# EAGLE board brama - print (EAGLE 6.3)
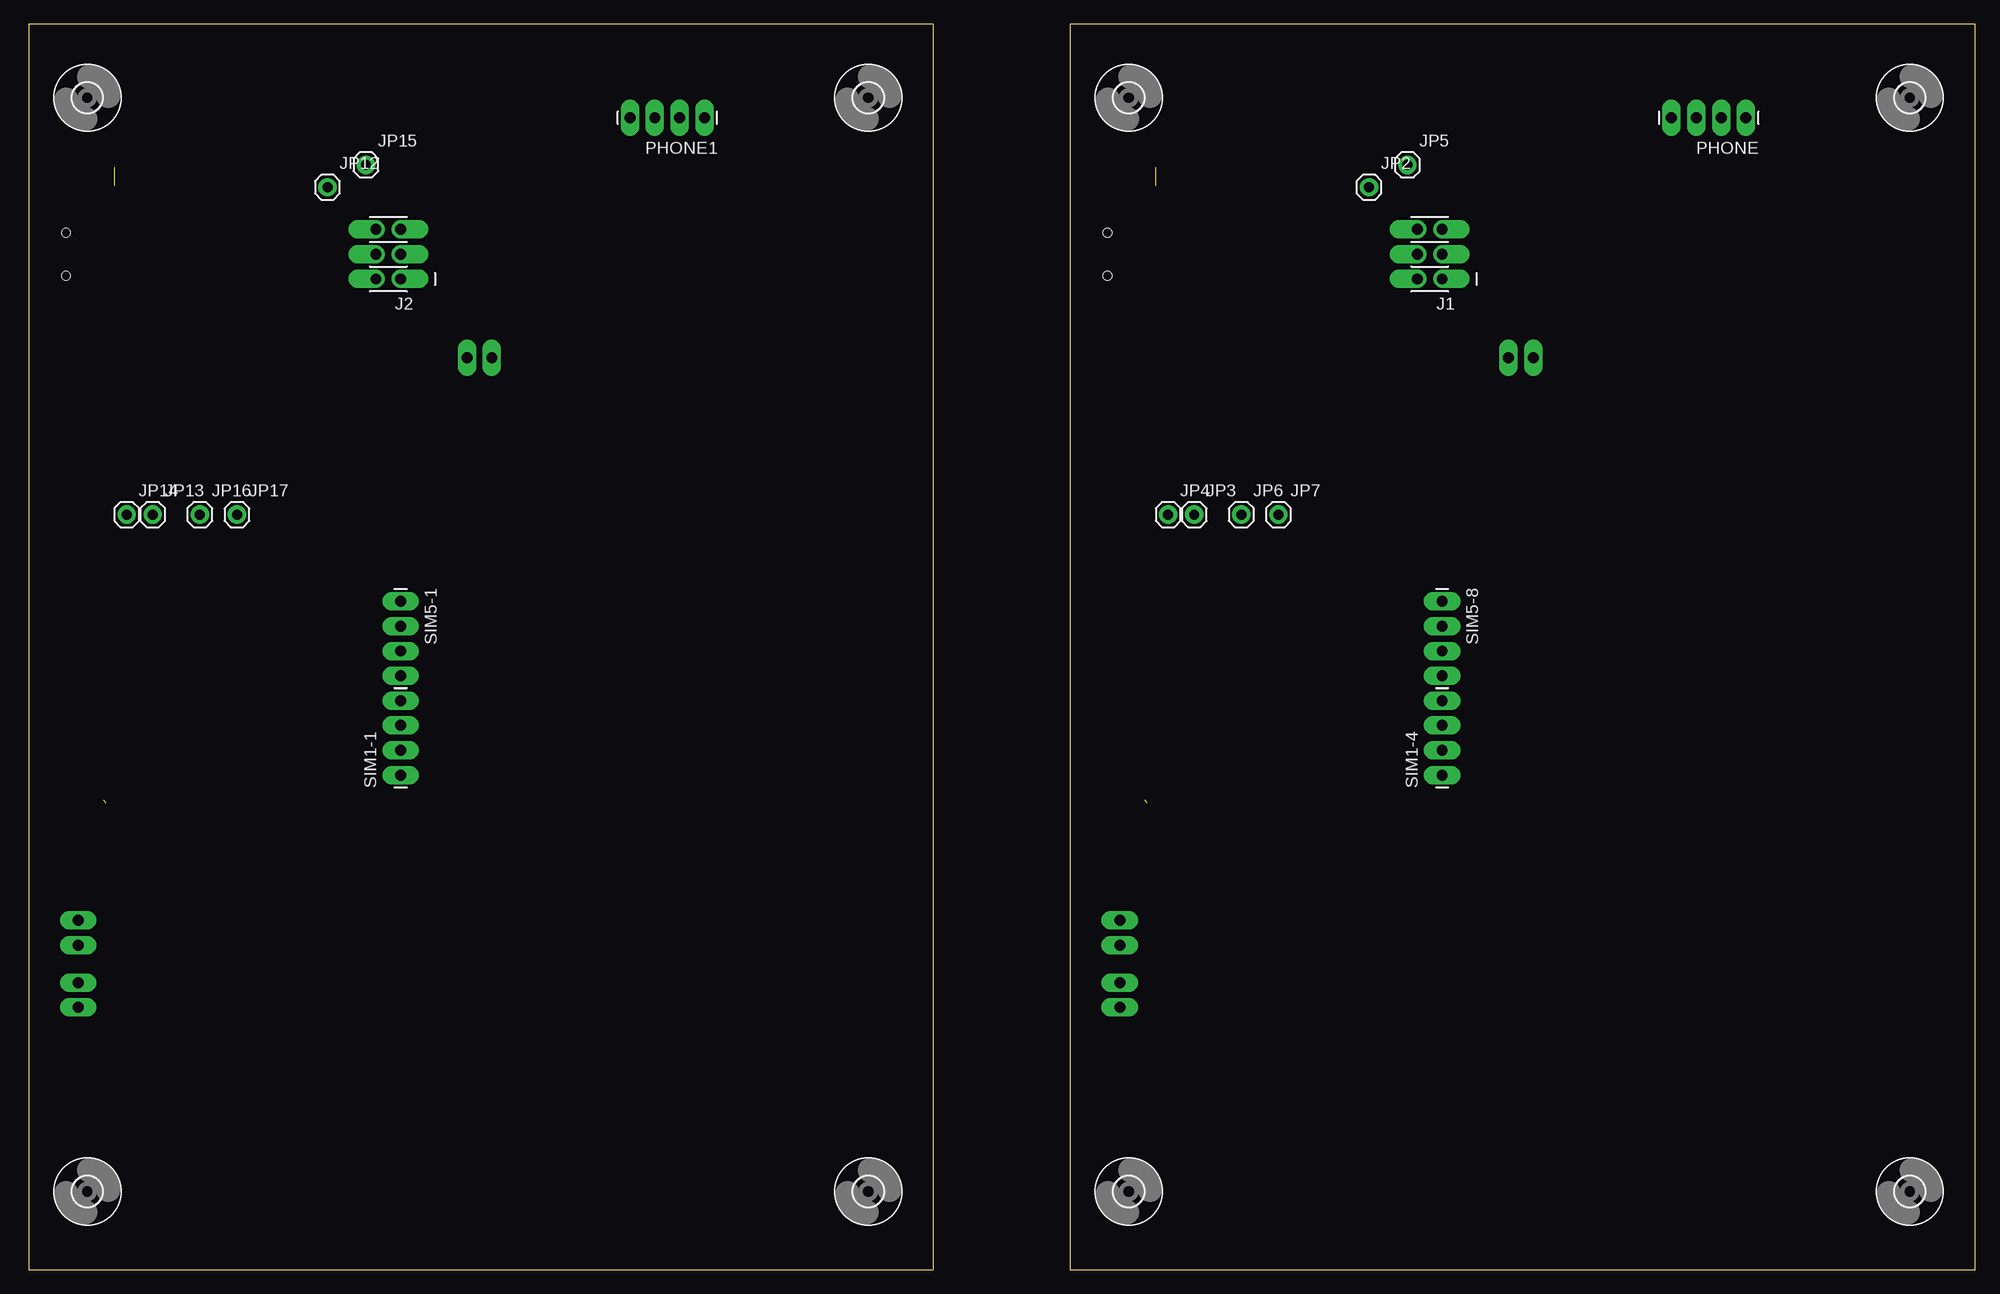
[diagram p0: board, top side]
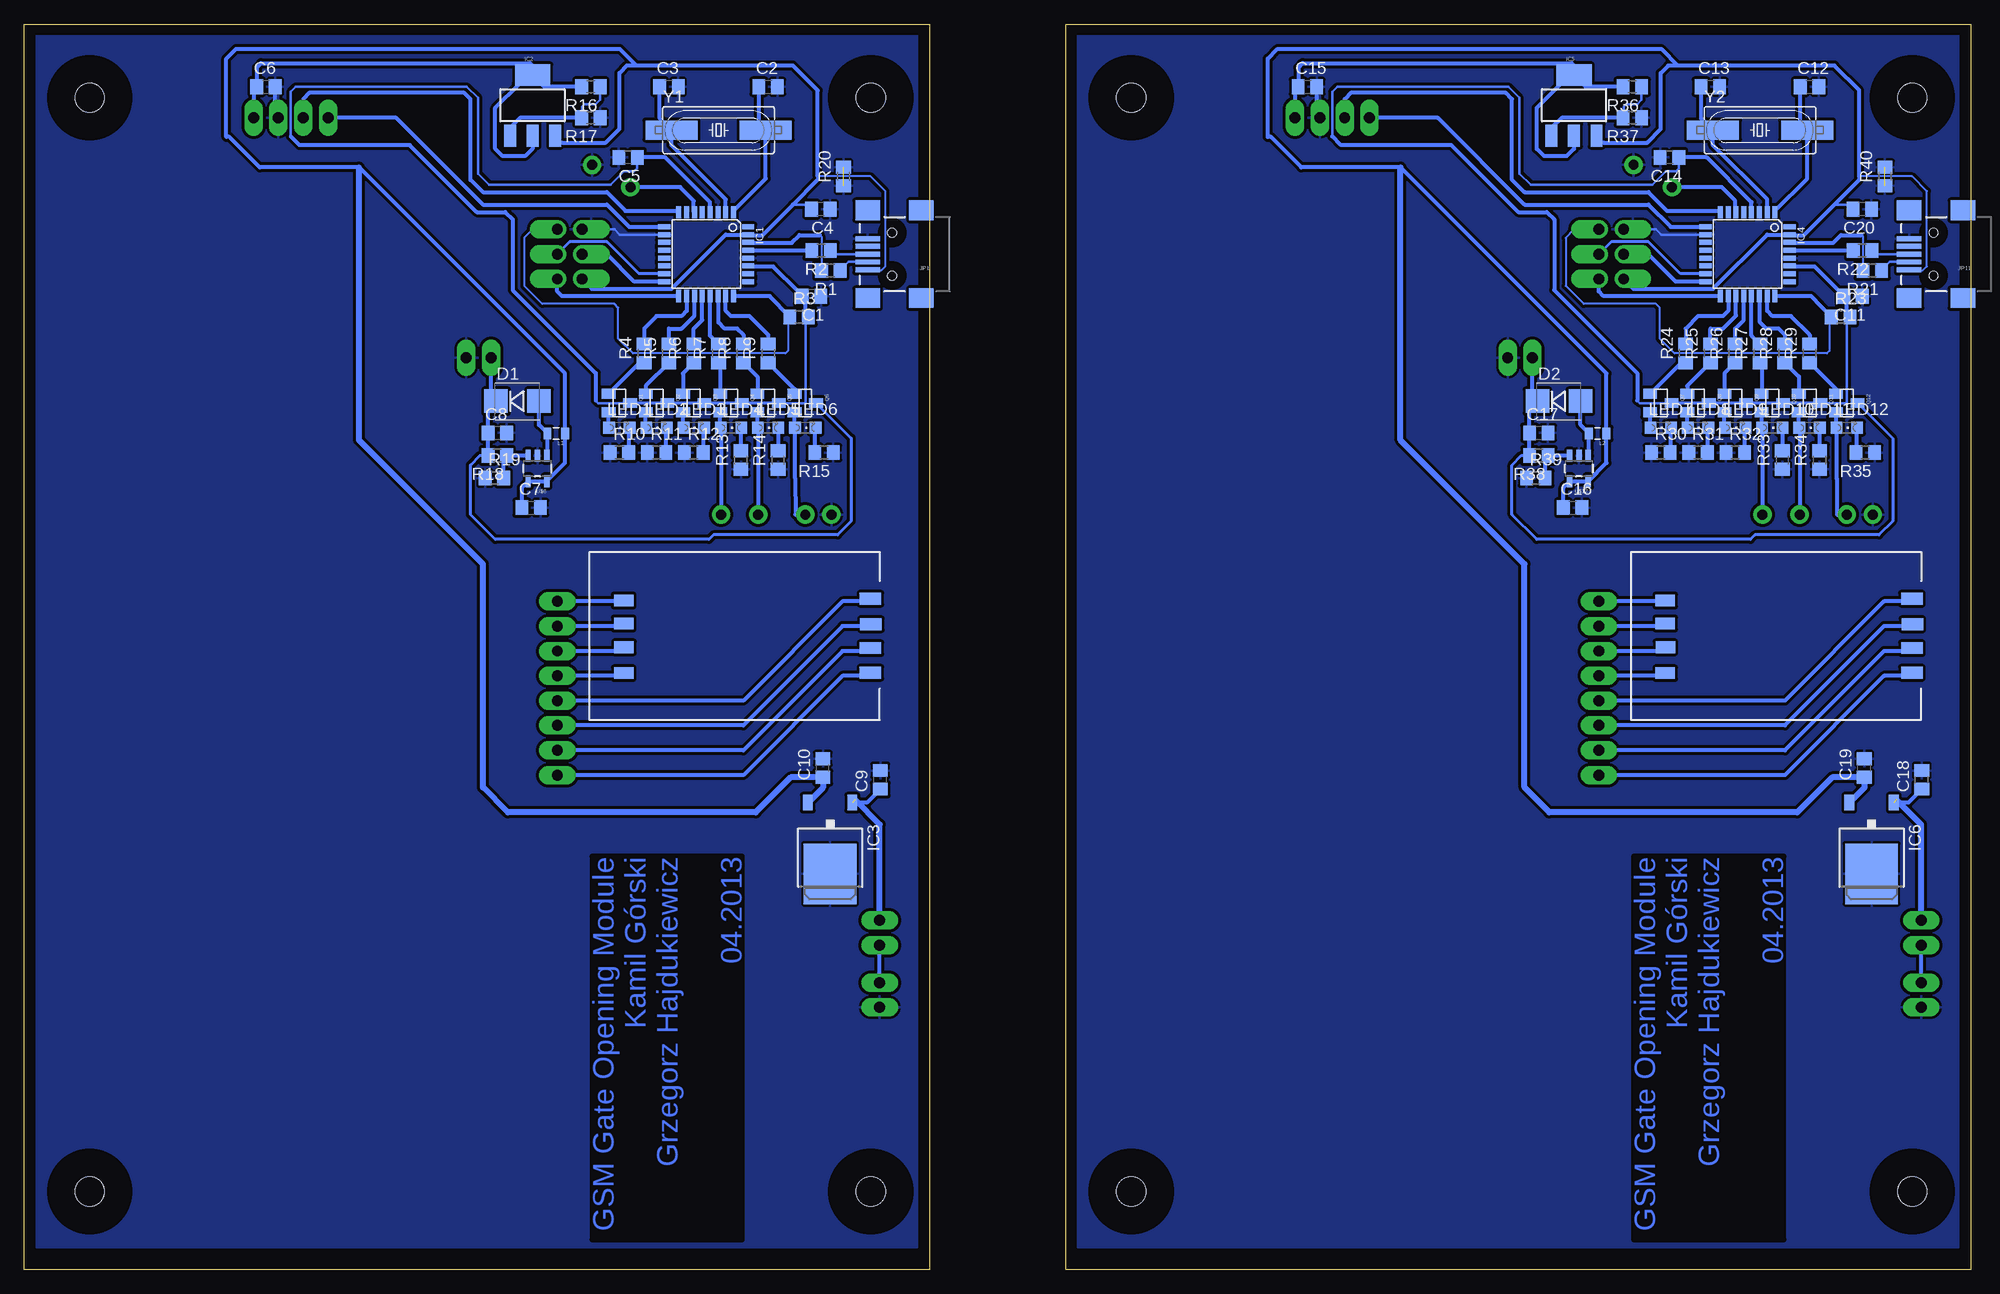
[diagram p1: board, bottom side, seen from below]

Size 199.37 x 127.51 mm. Coordinates in mm from the lower left corner, seen from the top.
Outline: 106.68,0 199.37,0 199.37,127.51 106.68,127.51 106.68,0
Outline: 0,0 92.69,0 92.69,127.51 0,127.51 0,0
Copper layers (1*16): Top 0.035mm / dielectric 1.5mm / Bottom 0.035mm
Design rules "default": minimum track width 10mil, minimum drill 24mil, track to track 8mil, track to pad 8mil, pad to pad 8mil, via to via 8mil, smd to smd 8mil, copper to edge 40mil, drill to drill 8mil, minimum pad ring 10mil, minimum via ring 8mil, stop-mask expansion 4mil, vias tented up to drill 0mil, thermal gap 10mil

## Footprints (pad centres in the part's own frame; a part is rotated, then mirrored left to right if it is on the bottom)
C0805 = smd 1.3 x 1.5: 1 -0.95,0; 2 0.95,0
SMB-DIODE = smd 2.4 x 2.4: A 2.2,0; C -2.2,0
TQFP32-08 = smd 1.27 x 0.508: 1 -4.293,2.8; 2 -4.293,2; 3 -4.293,1.2; 4 -4.293,0.4; 5 -4.293,-0.4; 6 -4.293,-1.2; 7 -4.293,-2; 8 -4.293,-2.8; 17 4.293,-2.8; 18 4.293,-2; 19 4.293,-1.2; 20 4.293,-0.4; 21 4.293,0.4; 22 4.293,1.2; 23 4.293,2; 24 4.293,2.8 | smd 0.508 x 1.27: 9 -2.8,-4.293; 10 -2,-4.293; 11 -1.2,-4.293; 12 -0.4,-4.293; 13 0.4,-4.293; 14 1.2,-4.293; 15 2,-4.293; 16 2.8,-4.293; 25 2.8,4.293; 26 2,4.293; 27 1.2,4.293; 28 0.4,4.293; 29 -0.4,4.293; 30 -1.2,4.293; 31 -2,4.293; 32 -2.8,4.293
SOT223 = smd 1.219 x 2.235: 1 -2.311,-3.099; 2 0,-3.099; 3 2.311,-3.099 | smd 3.6 x 2.2: 4 0,3.099
TO252 = smd 1 x 1.6: 1 -2.28,-4.8; 2 2.28,-4.8 | smd 5.4 x 6.2: 3 0,2.5
2X3_OFFSET = drill 1.118 pad 1.88 offset: 1 -2.54,-1.27; 2 -2.54,1.27; 3 0,-1.27; 4 0,1.27; 5 2.54,-1.27; 6 2.54,1.27
USB-MINIB = smd 2.5 x 0.5: D+ 2.5,0; D- 2.5,0.8; GND 2.5,-1.6; ID 2.5,-0.8; VBUS 2.5,1.6 | smd 2.5 x 2: MTN1 -3,4.5; MTN2 2.5,4.5; MTN3 -3,-4.5; MTN4 2.5,-4.5 | hole 0.9: 0,2.2; 0,-2.2
1X01 = drill 1.016 pad 1.88: 1 0,0
1X02_LONGPADS = drill 1.118 pad 1.88 long: 1 0,0; 2 2.54,0
0805 = smd 0.8 x 1.2: 1 -0.9,0; 2 0.9,0
CHIPLED_0805 = smd 1.2 x 1.2: A 0,-1.05; C 0,1.05
1X04_LONGPADS = drill 1.118 pad 1.88 long: 1 0,0; 2 2.54,0; 3 5.08,0; 4 7.62,0
SOT23 = smd 1 x 1.4: 1 -0.95,-1.1; 2 0.95,-1.1; 3 0,1.1
R0805 = smd 1.3 x 1.5: 1 -0.95,0; 2 0.95,0
SIMHOLDER2 = smd 2.2 x 1.2: 1 0.95,4.81; 2 0.91,7.41; 3 0.95,9.86; 4 0.95,12.39 | smd 2 x 1.2: 5 26.22,12.42; 6 26.2,9.78; 7 26.22,7.34; 8 26.22,4.98
3,0 = hole 3: 0,0
SOT23-5 = smd 0.55 x 1.2: !SHDN 0.95,1.3; FB 0.95,-1.3; GND 0,-1.3; SW -0.95,-1.3; VIN -0.95,1.3
HC49UP = smd 5.334 x 1.93: 1 -4.826,0; 2 4.826,0

## Placement (x,y rotation side)
C1  1uF  [C0805]  118.75,99.67 180 bottom
C2  22p  [C0805]  123.19,121.12 0 bottom
C3  22p  [C0805]  133.35,121.12 0 bottom
C4  22p  [C0805]  117.8,108.58 180 bottom
C5  100n  [C0805]  137.54,113.89 180 bottom
C6  100n  [C0805]  174.62,121.12 0 bottom
C7  4,7uF  [C0805]  147.46,78.03 0 bottom
C8  4,7uF  [C0805]  150.93,85.68 0 bottom
C9  330n  [C0805]  111.7,50.15 90 bottom
C10  100n  [C0805]  117.59,51.36 90 bottom
C11  1uF  [C0805]  12.07,99.67 180 bottom
C12  22p  [C0805]  16.51,121.12 0 bottom
C13  22p  [C0805]  26.67,121.12 0 bottom
C14  100n  [C0805]  30.86,113.89 180 bottom
C15  100n  [C0805]  67.95,121.12 0 bottom
C16  4,7uF  [C0805]  40.78,78.03 0 bottom
C17  4,7uF  [C0805]  44.25,85.68 0 bottom
C18  330n  [C0805]  5.02,50.15 90 bottom
C19  100n  [C0805]  10.91,51.36 90 bottom
C20  22p  [C0805]  11.12,108.58 180 bottom
D1  [SMB-DIODE]  148.87,88.93 0 bottom
D2  [SMB-DIODE]  42.19,88.93 0 bottom
E$1  [A4P-LOC]  238.76,-31.91 90 top  (outside the outline)
IC1  AT90USB162A  [TQFP32-08]  129.54,103.98 270 bottom
IC2  [SOT223]  147.32,119.22 0 bottom
IC3  7806DT  [TO252]  116.84,43.02 180 bottom
IC4  AT90USB162A  [TQFP32-08]  22.86,103.98 270 bottom
IC5  [SOT223]  40.64,119.22 0 bottom
IC6  7806DT  [TO252]  10.16,43.02 180 bottom
J1  AVR_SPI_PRG_6OFFSET_PADS  [2X3_OFFSET]  143.51,103.98 90 top
J2  AVR_SPI_PRG_6OFFSET_PADS  [2X3_OFFSET]  36.83,103.98 90 top
JP1  USBSMD  [USB-MINIB]  110.49,103.98 180 bottom
JP2  M01PTH  [1X01]  137.29,110.84 0 top
JP3  M01PTH  [1X01]  119.38,77.31 0 top
JP4  M01PTH  [1X01]  116.71,77.31 0 top
JP5  M01PTH  [1X01]  141.22,113.12 0 top
JP6  M01PTH  [1X01]  124.21,77.31 0 top
JP7  M01PTH  [1X01]  128.02,77.31 0 top
JP8  [1X02_LONGPADS]  151.58,93.37 0 top
JP9  [1X02_LONGPADS]  111.76,26.85 90 top
JP10  [1X02_LONGPADS]  111.76,35.77 270 top
JP11  USBSMD  [USB-MINIB]  3.81,103.98 180 bottom
JP12  M01PTH  [1X01]  30.61,110.84 0 top
JP13  M01PTH  [1X01]  12.7,77.31 0 top
JP14  M01PTH  [1X01]  10.03,77.31 0 top
JP15  M01PTH  [1X01]  34.54,113.12 0 top
JP16  M01PTH  [1X01]  17.53,77.31 0 top
JP17  M01PTH  [1X01]  21.34,77.31 0 top
JP18  [1X02_LONGPADS]  44.9,93.37 0 top
JP19  [1X02_LONGPADS]  5.08,26.85 90 top
JP20  [1X02_LONGPADS]  5.08,35.77 270 top
L1  [0805]  144.9,85.62 180 bottom
L2  [0805]  38.22,85.62 180 bottom
LED1  [CHIPLED_0805]  138.43,86.2 270 bottom
LED2  [CHIPLED_0805]  134.62,86.2 270 bottom
LED3  [CHIPLED_0805]  130.81,86.2 270 bottom
LED4  [CHIPLED_0805]  127,86.2 270 bottom
LED5  [CHIPLED_0805]  123.19,86.2 270 bottom
LED6  [CHIPLED_0805]  119.38,86.2 270 bottom
LED7  [CHIPLED_0805]  31.75,86.2 270 bottom
LED8  [CHIPLED_0805]  27.94,86.2 270 bottom
LED9  [CHIPLED_0805]  24.13,86.2 270 bottom
LED10  [CHIPLED_0805]  20.32,86.2 270 bottom
LED11  [CHIPLED_0805]  16.51,86.2 270 bottom
LED12  [CHIPLED_0805]  12.7,86.2 270 bottom
PHONE  [1X04_LONGPADS]  175.9,117.95 180 top
PHONE1  [1X04_LONGPADS]  69.22,117.95 180 top
Q1  [SOT23]  138.43,88.74 270 bottom
Q2  [SOT23]  134.62,88.74 270 bottom
Q3  [SOT23]  130.81,88.74 270 bottom
Q4  [SOT23]  127,88.74 270 bottom
Q5  [SOT23]  123.19,88.74 270 bottom
Q6  [SOT23]  119.38,88.74 270 bottom
Q7  [SOT23]  31.75,88.74 270 bottom
Q8  [SOT23]  27.94,88.74 270 bottom
Q9  [SOT23]  24.13,88.74 270 bottom
Q10  [SOT23]  20.32,88.74 270 bottom
Q11  [SOT23]  16.51,88.74 270 bottom
Q12  [SOT23]  12.7,88.74 270 bottom
R1  22R  [R0805]  116.78,102.31 180 bottom
R2  22R  [R0805]  117.77,104.35 180 bottom
R3  4k7  [R0805]  120.02,97.53 0 bottom
R4  [R0805]  135.89,93.82 90 bottom
R5  [R0805]  133.35,93.82 90 bottom
R6  [R0805]  130.81,93.82 90 bottom
R7  [R0805]  128.27,93.82 90 bottom
R8  [R0805]  125.73,93.82 90 bottom
R9  [R0805]  123.19,93.82 90 bottom
R10  100  [R0805]  138.43,83.66 0 bottom
R11  100  [R0805]  134.62,83.66 0 bottom
R12  100  [R0805]  130.81,83.66 0 bottom
R13  100  [R0805]  125.98,82.9 90 bottom
R14  100  [R0805]  122.17,82.9 90 bottom
R15  470  [R0805]  117.48,83.66 180 bottom
R16  [R0805]  141.35,121.12 180 bottom
R17  [R0805]  141.35,117.95 180 bottom
R18  240k  [R0805]  150.93,83.37 180 bottom
R19  27k  [R0805]  151.23,81.05 0 bottom
R20  0  [R0805]  115.47,111.94 90 bottom
R21  22R  [R0805]  10.1,102.31 180 bottom
R22  22R  [R0805]  11.09,104.35 180 bottom
R23  4k7  [R0805]  13.34,97.53 0 bottom
R24  [R0805]  29.21,93.82 90 bottom
R25  [R0805]  26.67,93.82 90 bottom
R26  [R0805]  24.13,93.82 90 bottom
R27  [R0805]  21.59,93.82 90 bottom
R28  [R0805]  19.05,93.82 90 bottom
R29  [R0805]  16.51,93.82 90 bottom
R30  100  [R0805]  31.75,83.66 0 bottom
R31  100  [R0805]  27.94,83.66 0 bottom
R32  100  [R0805]  24.13,83.66 0 bottom
R33  100  [R0805]  19.3,82.9 90 bottom
R34  100  [R0805]  15.49,82.9 90 bottom
R35  470  [R0805]  10.8,83.66 180 bottom
R36  [R0805]  34.67,121.12 180 bottom
R37  [R0805]  34.67,117.95 180 bottom
R38  240k  [R0805]  44.25,83.37 180 bottom
R39  27k  [R0805]  44.55,81.05 0 bottom
R40  0  [R0805]  8.79,111.94 90 bottom
SIM1-1  [1X04_LONGPADS]  38.1,50.64 90 top
SIM1-4  [1X04_LONGPADS]  144.78,50.64 90 top
SIM5-1  [1X04_LONGPADS]  38.1,68.42 270 top
SIM5-8  [1X04_LONGPADS]  144.78,68.42 270 top
U$1  SIMHOLDER2  [SIMHOLDER2]  111.76,73.5 180 bottom
U$2  [3,0]  192.68,8 0 top
U$3  [3,0]  112.68,120 0 top
U$4  [3,0]  192.68,120 0 top
U$5  [3,0]  112.68,8 0 top
U$6  LM2704MF-ADJ  [SOT23-5]  146.82,82.03 180 bottom
U$7  SIMHOLDER2  [SIMHOLDER2]  5.08,73.5 180 bottom
U$8  [3,0]  86,8 0 top
U$9  [3,0]  6,120 0 top
U$10  [3,0]  86,120 0 top
U$11  [3,0]  6,8 0 top
U$12  LM2704MF-ADJ  [SOT23-5]  40.14,82.03 180 bottom
Y1  [HC49UP]  128.27,116.68 0 bottom
Y2  [HC49UP]  21.59,116.68 0 bottom

## Library data of the parts
C1-C20 R1-R40 = rcl
D1 D2 Q1-Q12 = SparkFun-DiscreteSemi
E$1 = frames
IC1 IC4 = adafruit
IC2 IC5 = SparkFun-PowerIC
IC3 IC6 = linear
J1 J2 JP1-JP20 PHONE PHONE1 SIM1-1 SIM1-4 SIM5-1 SIM5-8 U$1 U$7 = SparkFun-Connectors
L1 L2 = SparkFun-Passives
LED1-LED12 = led
U$2-U$5 U$8-U$11 = holes
U$6 U$12 = Step-Up
Y1 Y2 = SparkFun-FreqCtrl

## Nets
3V1: C11.2 C14.1 IC4.4 IC4.27 Q7.3 Q8.3 Q9.3 Q10.3 Q11.3 R23.2
3V3: C1.2 C5.1 IC1.4 IC1.27 Q1.3 Q2.3 Q3.3 Q4.3 Q5.3 R3.2
5V: C4.2 C7.1 C10.1 IC1.31 IC2.3 IC3.2 J1.2 JP1.VBUS L1.1 U$6.!SHDN U$6.VIN
5V1: C16.1 C19.1 C20.2 IC4.31 IC5.3 IC6.2 J2.2 JP11.VBUS L2.1 U$12.!SHDN U$12.VIN
12V: C8.1 D1.C JP8.1 Q6.3 R18.2
12V1: C17.1 D2.C JP18.1 Q12.3 R38.2
BUTTON: IC1.6 JP2.1
BUTTON1: IC1.21 R7.2
BUTTON2: IC1.22 R8.2
BUTTON3: IC4.6 JP12.1
BUTTON4: IC4.21 R27.2
BUTTON5: IC4.22 R28.2
D+: JP1.D+ R2.1
D+1: JP11.D+ R22.1
D-: JP1.D- R1.1
D-1: JP11.D- R21.1
GATE: IC1.23 R9.2
GATE1: IC4.23 R29.2
GND: C1.1 C2.2 C3.2 C4.1 C5.2 C6.2 C7.2 C8.2 C9.2 C10.2 IC1.3 IC1.10 IC1.28 IC3.3 J1.6 JP1.GND JP4.1 JP5.1 JP8.2 JP9.1 PHONE.2 R10.1 R11.1 R12.1 R13.1 R14.1 R15.1 R17.1 R19.1 R20.1 R20.2 U$6.GND
GND1: C11.1 C12.2 C13.2 C14.2 C15.2 C16.2 C17.2 C18.2 C19.2 C20.1 IC4.3 IC4.10 IC4.28 IC6.3 J2.6 JP11.GND JP14.1 JP15.1 JP18.2 JP19.1 PHONE1.2 R30.1 R31.1 R32.1 R33.1 R34.1 R35.1 R37.1 R39.1 R40.1 R40.2 U$12.GND
LED1: IC1.18 R4.2
LED2: IC1.19 R5.2
LED3: IC1.20 R6.2
LED4: IC4.18 R24.2
LED5: IC4.19 R25.2
LED6: IC4.20 R26.2
MISO: IC1.17 J1.1
MISO1: IC4.17 J2.1
MOSI: IC1.16 J1.4
MOSI1: IC4.16 J2.4
N$1: IC1.30 R1.2
N$2: IC1.29 R2.2
N$3: C2.1 IC1.1 Y1.2
N$4: C3.1 IC1.2 Y1.1
N$5: SIM1-4.4 U$1.1
N$6: LED1.A Q1.2
N$7: LED2.A Q2.2
N$8: LED3.A Q3.2
N$9: JP7.1 LED4.A Q4.2
N$10: JP6.1 LED5.A Q5.2
N$11: JP3.1 LED6.A Q6.2
N$12: Q1.1 R4.1
N$13: Q2.1 R5.1
N$14: Q3.1 R6.1
N$15: Q4.1 R7.1
N$16: Q5.1 R8.1
N$17: Q6.1 R9.1
N$18: LED1.C R10.2
N$19: LED2.C R11.2
N$20: LED3.C R12.2
N$21: LED4.C R13.2
N$22: LED5.C R14.2
N$23: LED6.C R15.2
N$24: SIM5-8.1 U$1.8
N$25: SIM5-8.2 U$1.7
N$26: SIM5-8.3 U$1.6
N$27: SIM5-8.4 U$1.5
N$28: SIM1-4.1 U$1.4
N$29: SIM1-4.2 U$1.3
N$30: SIM1-4.3 U$1.2
N$31: D1.A L1.2 U$6.SW
N$32: IC2.1 R16.1 R17.2
N$33: IC4.30 R21.2
N$34: R18.1 R19.2 U$6.FB
N$35: IC4.29 R22.2
N$36: C13.1 IC4.2 Y2.1
N$37: LED7.A Q7.2
N$38: LED8.A Q8.2
N$39: LED9.A Q9.2
N$40: JP17.1 LED10.A Q10.2
N$41: JP16.1 LED11.A Q11.2
N$42: JP13.1 LED12.A Q12.2
N$43: Q7.1 R24.1
N$44: Q8.1 R25.1
N$45: Q9.1 R26.1
N$46: Q10.1 R27.1
N$47: Q11.1 R28.1
N$48: Q12.1 R29.1
N$49: LED7.C R30.2
N$50: LED8.C R31.2
N$51: LED9.C R32.2
N$52: LED10.C R33.2
N$53: LED11.C R34.2
N$54: LED12.C R35.2
N$55: C12.1 IC4.1 Y2.2
N$56: SIM1-1.4 U$7.1
N$57: SIM5-1.1 U$7.8
N$58: SIM5-1.2 U$7.7
N$59: SIM5-1.3 U$7.6
N$60: SIM5-1.4 U$7.5
N$61: SIM1-1.1 U$7.4
N$62: SIM1-1.2 U$7.3
N$63: SIM1-1.3 U$7.2
N$64: IC5.1 R36.1 R37.2
N$65: R38.1 R39.2 U$12.FB
N$66: D2.A L2.2 U$12.SW
PHONE_PWR: C6.1 IC2.2 IC2.4 PHONE.1 R16.2
PHONE_PWR1: C15.1 IC5.2 IC5.4 PHONE1.1 R36.2
RESET: IC1.24 J1.5 R3.1
RESET1: IC4.24 J2.5 R23.1
RXD: IC1.8 PHONE.3
RXD1: IC4.8 PHONE1.3
SCK: IC1.15 J1.3
SCK1: IC4.15 J2.3
TXD: IC1.9 PHONE.4
TXD1: IC4.9 PHONE1.4
VIN: C9.1 IC3.1 JP10.1
VIN1: C18.1 IC6.1 JP20.1
VIN_S: JP9.2 JP10.2
VIN_S1: JP19.2 JP20.2

## Tracks (layer width: path | path; a pad name or v marks a point on that pad's centre or on a via)
3V1
  Bottom 0.254: 34.16,88.99 33.91,88.74 Q7.3 | 65.41,116.05 65.41,120.62 64.9,121.12 47.37,121.12 46.23,119.98 46.23,112.23 45.09,111.09 32.64,111.09 31.24,112.49 30.23,112.49 29.91,112.8 C14.1 | Q11.3 12.8,88.74 12.7,88.84 12.7,97.31 R23.2
  Bottom 0.305: Q11.3 Q10.3 Q9.3 Q8.3 Q7.3
  Bottom 0.406: IC4.27 18.5,102.71 16,102.71 13.46,100.17 C11.2 12.7,99.86 12.7,97.88 12.45,97.63 R23.2 | 22.48,109.31 22.46,109.3 IC4.4 22.48,108.29 22.48,109.31 | 22.48,109.31 27.05,113.89 C14.1 | 34.16,88.99 34.16,91.79 42.67,100.3 42.67,107.54 43.43,108.3 46.36,108.3 53.21,115.16 64.52,115.16 65.41,116.05
3V3
  Bottom 0.254: 140.84,88.99 140.59,88.74 Q1.3 | 172.09,116.05 172.09,120.62 171.58,121.12 154.05,121.12 152.91,119.98 152.91,112.23 151.77,111.09 139.32,111.09 137.92,112.49 136.91,112.49 136.59,112.8 C5.1 | Q5.3 119.48,88.74 119.38,88.84 119.38,97.31 R3.2
  Bottom 0.305: Q5.3 Q4.3 Q3.3 Q2.3 Q1.3
  Bottom 0.406: IC1.27 125.18,102.71 122.68,102.71 120.14,100.17 C1.2 119.38,99.86 119.38,97.88 119.13,97.63 R3.2 | 129.16,109.31 129.14,109.3 IC1.4 129.16,108.29 129.16,109.31 | 129.16,109.31 133.73,113.89 C5.1 | 140.84,88.99 140.84,91.79 149.35,100.3 149.35,107.54 150.11,108.3 153.03,108.3 159.89,115.16 171.2,115.16 172.09,116.05
5V
  Bottom 0.203: 112.83,102.34 111.58,102.34 111.18,102.74 111.18,110.44 112.68,111.94 118.11,111.94
  Bottom 0.254: IC2.3 144.3,115.41 | IC1.31 125.21,105.94 | JP1.VBUS 112.93,102.44 112.83,102.34 | 118.11,111.61 118.11,111.94 | C4.2 119.24,109.06 120.66,109.06
  Bottom 0.406: J1.2 141.22,100.42 133.1,100.42 127.54,105.98 IC1.31 | 144.3,115.41 139.83,115.41 138.43,116.81 138.43,122.52 137.67,123.28 136.68,123.28 | 136.68,123.28 120.65,123.28 118.11,120.74 118.11,111.94 | 136.68,123.28 138.4,125 177.68,125 178.68,124 178.68,116 178.39,116 175.26,112.87 165.1,112.87 144,91.77 L1.1 144,82.6 U$6.VIN U$6.!SHDN 148.41,80.09 C7.1 | 125.21,105.94 123.78,105.94 120.66,109.06 118.11,111.61
  Bottom 0.61: IC3.2 117.59,49.35 C10.1 120.88,50.41 124.46,46.83 149.86,46.83 152.4,49.37 152.4,72.23 165.1,84.93 165.1,112.87
5V1
  Bottom 0.203: 6.15,102.34 4.9,102.34 4.5,102.74 4.5,110.44 6,111.94 11.43,111.94
  Bottom 0.254: IC5.3 37.62,115.41 | IC4.31 18.53,105.94 | JP11.VBUS 6.25,102.44 6.15,102.34 | 11.43,111.61 11.43,111.94 | C20.2 12.56,109.06 13.98,109.06
  Bottom 0.406: J2.2 34.54,100.42 26.42,100.42 20.86,105.98 IC4.31 | 37.62,115.41 33.15,115.41 31.75,116.81 31.75,122.52 30.99,123.28 30,123.28 | 30,123.28 13.97,123.28 11.43,120.74 11.43,111.94 | 30,123.28 31.72,125 71,125 72,124 72,116 71.71,116 68.58,112.87 58.42,112.87 37.32,91.77 L2.1 37.32,82.6 U$12.VIN U$12.!SHDN 41.73,80.09 C16.1 | 18.53,105.94 17.1,105.94 13.98,109.06 11.43,111.61
  Bottom 0.61: IC6.2 10.91,49.35 C19.1 14.2,50.41 17.78,46.83 43.18,46.83 45.72,49.37 45.72,72.23 58.42,84.93 58.42,112.87
12V
  Bottom 0.305: Q6.3 114.68,85.14 114.68,76.64 116.08,75.24 128.78,75.24 129.25,74.77 151.13,74.77 153.67,77.31 153.67,82.39 152.69,83.37 R18.2
  Bottom 0.406: R18.2 | R18.2 C8.1 151.88,88.12 D1.C 151.58,89.44 JP8.1
12V1
  Bottom 0.305: Q12.3 8,85.14 8,76.64 9.4,75.24 22.1,75.24 22.57,74.77 44.45,74.77 46.99,77.31 46.99,82.39 46.01,83.37 R38.2
  Bottom 0.406: R38.2 | R38.2 C17.1 45.2,88.12 D2.C 44.9,89.44 JP18.1
BUTTON
  Bottom 0.406: IC1.6 130.81,108.34 130.81,109.44 132.21,110.84 JP2.1
BUTTON1
  Bottom 0.406: IC1.21 129.14,95.64 R7.2
BUTTON2
  Bottom 0.406: IC1.22 128.27,99.62 128.27,97 127.64,96.36 126.37,96.36 125.73,95.73 R8.2
BUTTON3
  Bottom 0.406: IC4.6 24.13,108.34 24.13,109.44 25.53,110.84 JP12.1
BUTTON4
  Bottom 0.406: IC4.21 22.46,95.64 R27.2
BUTTON5
  Bottom 0.406: IC4.22 21.59,99.62 21.59,97 20.96,96.36 19.69,96.36 19.05,95.73 R28.2
D+
  Bottom 0.254: R2.1 116.46,103.98 JP1.D+
D+1
  Bottom 0.254: R22.1 9.78,103.98 JP11.D+
D-
  Bottom 0.254: R1.1 114.96,103.18 JP1.D-
D-1
  Bottom 0.254: R21.1 8.28,103.18 JP11.D-
GATE
  Bottom 0.406: IC1.23 127.54,98.17 127,97.63 125.09,97.63 123.19,95.73 R9.2
GATE1
  Bottom 0.406: IC4.23 20.86,98.17 20.32,97.63 18.42,97.63 16.51,95.73 R29.2
GND  (1 unrouted)
  Bottom 0.254: J1.6 138.94,106.52 138.4,105.98 IC1.10
  Bottom 0.406: PHONE.2 173.68,118.27 C6.2
  pour Bottom (isolate 0.305): 107.95,126.57 198.12,126.57 198.12,2.27 107.95,2.27
GND1  (1 unrouted)
  Bottom 0.254: J2.6 32.26,106.52 31.72,105.98 IC4.10
  Bottom 0.406: PHONE1.2 67,118.27 C15.2
  pour Bottom (isolate 0.305): 1.27,126.57 91.44,126.57 91.44,2.27 1.27,2.27
LED1
  Bottom 0.406: IC1.18 131.54,98.17 132.08,97.63 134.62,97.63 135.89,96.36 R4.2
LED2
  Bottom 0.406: R5.2 133.35,96.36 132.08,96.36 130.74,97.7 IC1.19
LED3
  Bottom 0.406: R6.2 130.81,96.36 129.94,97.23 IC1.20
LED4
  Bottom 0.406: IC4.18 24.86,98.17 25.4,97.63 27.94,97.63 29.21,96.36 R24.2
LED5
  Bottom 0.406: R25.2 26.67,96.36 25.4,96.36 24.06,97.7 IC4.19
LED6
  Bottom 0.406: R26.2 24.13,96.36 23.26,97.23 IC4.20
MISO
  Bottom 0.406: IC1.17 144.3,99.69 144.78,100.17 J1.1
MISO1
  Bottom 0.406: IC4.17 37.62,99.69 38.1,100.17 J2.1
MOSI
  Bottom 0.406: IC1.16 136.9,101.18 139.7,103.98 J1.4
MOSI1
  Bottom 0.406: IC4.16 30.22,101.18 33.02,103.98 J2.4
N$1
  Bottom 0.203: 117.88,105.94 117.73,105.78 R1.2
  Bottom 0.254: 125.18,105.25 125.07,105.14
  Bottom 0.406: IC1.30 125.18,105.25 | 125.07,105.14 120.78,105.14 119.98,105.94 117.88,105.94
N$2
  Bottom 0.406: IC1.29 118.76,104.38 R2.2
N$3
  Bottom 0.406: C2.1 124.14,117.38 Y1.2 123.44,111.73 126.74,108.43 IC1.1
N$4
  Bottom 0.406: C3.1 134.3,117.88 Y1.1 133.1,115.16 127.54,109.6 IC1.2
N$5
  Bottom 0.406: U$1.1 112.98,68.42 115.57,68.42 125.73,58.26 SIM1-4.4
N$6
  Bottom 0.406: LED1.A 139.53,86.25 Q1.2
N$7
  Bottom 0.406: LED2.A 135.72,86.25 Q2.2
N$8
  Bottom 0.406: LED3.A 131.91,86.25 Q3.2
N$9
  Bottom 0.406: Q4.2 128.1,86.25 LED4.A 128.02,86.17 JP7.1
N$10
  Bottom 0.406: Q5.2 124.29,86.25 LED5.A 124.21,86.17 JP6.1
N$11
  Bottom 0.406: Q6.2 120.48,86.25 LED6.A 120.43,81.03 120.4,77.31 JP3.1
N$12
  Bottom 0.406: Q1.1 136.35,92.87 R4.1
N$13
  Bottom 0.406: R5.1 135.72,90.5 Q2.1
N$14
  Bottom 0.406: R6.1 131.91,91.77 Q3.1
N$15
  Bottom 0.406: R7.1 128.1,92.7 Q4.1
N$16
  Bottom 0.406: R8.1 124.29,91.43 Q5.1
N$17
  Bottom 0.406: R9.1 120.48,90.16 Q6.1
N$18
  Bottom 0.406: LED1.C 137.48,86.1 R10.2
N$19
  Bottom 0.406: LED2.C 133.67,86.1 R11.2
N$20
  Bottom 0.406: LED3.C 129.86,86.1 R12.2
N$21
  Bottom 0.406: 126.05,86.1 LED4.C 125.95,83.88 R13.2
N$22
  Bottom 0.406: 122.24,86.1 LED5.C 122.14,83.88 R14.2
N$23
  Bottom 0.406: LED6.C 118.43,86.1 R15.2
N$24
  Bottom 0.406: U$1.8 138.08,68.42 SIM5-8.1
N$25
  Bottom 0.406: U$1.7 138.26,65.88 SIM5-8.2
N$26
  Bottom 0.406: U$1.6 138.34,63.34 SIM5-8.3
N$27
  Bottom 0.406: U$1.5 138.26,60.8 SIM5-8.4
N$28
  Bottom 0.406: U$1.4 113.02,60.8 115.57,60.8 125.73,50.64 SIM1-4.1
N$29
  Bottom 0.406: U$1.3 113.01,63.34 115.57,63.34 125.73,53.18 SIM1-4.2
N$30
  Bottom 0.406: U$1.2 112.88,65.88 115.57,65.88 125.73,55.72 SIM1-4.3
N$31
  Bottom 0.406: U$6.SW 145.8,83.33 L1.2 146.67,86.49 D1.A
N$32
  Bottom 0.254: R17.2 142.24,118.01 142.24,119.09 141.99,119.35 140.84,119.35 140.4,119.79 R16.1
  Bottom 0.406: R17.2 148.59,117.95 149.63,116.91 IC2.1
N$33
  Bottom 0.203: 11.2,105.94 11.05,105.78 R21.2
  Bottom 0.254: 18.5,105.25 18.39,105.14
  Bottom 0.406: IC4.30 18.5,105.25 | 18.39,105.14 14.1,105.14 13.3,105.94 11.2,105.94
N$34
  Bottom 0.406: R18.1 | U$6.FB 149.98,83.33 R18.1 | R19.2 150.28,83.07 R18.1
N$35
  Bottom 0.406: IC4.29 12.08,104.38 R22.2
N$36
  Bottom 0.406: C13.1 27.62,117.88 Y2.1 26.42,115.16 20.86,109.6 IC4.2
N$37
  Bottom 0.406: LED7.A 32.85,86.25 Q7.2
N$38
  Bottom 0.406: LED8.A 29.04,86.25 Q8.2
N$39
  Bottom 0.406: LED9.A 25.23,86.25 Q9.2
N$40
  Bottom 0.406: Q10.2 21.42,86.25 LED10.A 21.34,86.17 JP17.1
N$41
  Bottom 0.406: Q11.2 17.61,86.25 LED11.A 17.53,86.17 JP16.1
N$42
  Bottom 0.406: Q12.2 13.8,86.25 LED12.A 13.75,81.03 13.72,77.31 JP13.1
N$43
  Bottom 0.406: Q7.1 29.67,92.87 R24.1
N$44
  Bottom 0.406: R25.1 29.04,90.5 Q8.1
N$45
  Bottom 0.406: R26.1 25.23,91.77 Q9.1
N$46
  Bottom 0.406: R27.1 21.42,92.7 Q10.1
N$47
  Bottom 0.406: R28.1 17.61,91.43 Q11.1
N$48
  Bottom 0.406: R29.1 13.8,90.16 Q12.1
N$49
  Bottom 0.406: LED7.C 30.8,86.1 R30.2
N$50
  Bottom 0.406: LED8.C 26.99,86.1 R31.2
N$51
  Bottom 0.406: LED9.C 23.18,86.1 R32.2
N$52
  Bottom 0.406: 19.37,86.1 LED10.C 19.27,83.88 R33.2
N$53
  Bottom 0.406: 15.56,86.1 LED11.C 15.46,83.88 R34.2
N$54
  Bottom 0.406: LED12.C 11.75,86.1 R35.2
N$55
  Bottom 0.406: C12.1 17.46,117.38 Y2.2 16.76,111.73 20.06,108.43 IC4.1
N$56
  Bottom 0.406: U$7.1 6.3,68.42 8.89,68.42 19.05,58.26 SIM1-1.4
N$57
  Bottom 0.406: U$7.8 31.4,68.42 SIM5-1.1
N$58
  Bottom 0.406: U$7.7 31.58,65.88 SIM5-1.2
N$59
  Bottom 0.406: U$7.6 31.66,63.34 SIM5-1.3
N$60
  Bottom 0.406: U$7.5 31.58,60.8 SIM5-1.4
N$61
  Bottom 0.406: U$7.4 6.34,60.8 8.89,60.8 19.05,50.64 SIM1-1.1
N$62
  Bottom 0.406: U$7.3 6.33,63.34 8.89,63.34 19.05,53.18 SIM1-1.2
N$63
  Bottom 0.406: U$7.2 6.2,65.88 8.89,65.88 19.05,55.72 SIM1-1.3
N$64
  Bottom 0.254: R37.2 35.56,118.01 35.56,119.09 35.31,119.35 34.16,119.35 33.72,119.79 R36.1
  Bottom 0.406: R37.2 41.91,117.95 42.95,116.91 IC5.1
N$65
  Bottom 0.406: R38.1 | U$12.FB 43.3,83.33 R38.1 | R39.2 43.6,83.07 R38.1
N$66
  Bottom 0.406: U$12.SW 39.12,83.33 L2.2 39.99,86.49 D2.A
PHONE_PWR
  Bottom 0.406: R16.2 146.13,121.12 IC2.4 | IC2.2 147.32,114.78 148.08,114.01 150.37,114.01 151.13,114.78 151.13,118.97 148.65,121.44 | 148.65,121.44 147.78,122.32 IC2.4 | 148.91,121.44 148.65,121.44 | IC2.4 147.32,123.28 147.57,123.54 175.13,123.54 175.57,123.1 C6.1 175.9,120.81 PHONE.1
PHONE_PWR1
  Bottom 0.406: R36.2 39.45,121.12 IC5.4 | IC5.2 40.64,114.78 41.4,114.01 43.69,114.01 44.45,114.78 44.45,118.97 41.97,121.44 | 41.97,121.44 41.1,122.32 IC5.4 | 42.23,121.44 41.97,121.44 | IC5.4 40.64,123.28 40.89,123.54 68.45,123.54 68.9,123.1 C15.1 69.22,120.81 PHONE1.1
RESET
  Bottom 0.203: 121.16,97.88 121.16,94.07 121.41,93.82 137.03,93.82 138.56,95.34 138.56,98.52 138.94,98.9 146.34,98.9 148.18,100.74 148.18,105.66 147.32,106.52
  Bottom 0.254: IC1.24 126.72,99.66 122.94,99.66 121.16,97.88
  Bottom 0.406: 147.32,106.52 J1.5 | R3.1 123.02,99.69 IC1.24
RESET1
  Bottom 0.203: 14.48,97.88 14.48,94.07 14.73,93.82 30.35,93.82 31.88,95.34 31.88,98.52 32.26,98.9 39.66,98.9 41.5,100.74 41.5,105.66 40.64,106.52
  Bottom 0.254: IC4.24 20.04,99.66 16.26,99.66 14.48,97.88
  Bottom 0.406: 40.64,106.52 J2.5 | R23.1 16.34,99.69 IC4.24
RXD
  Bottom 0.406: IC1.8 132.49,108.42 137.8,108.42 139.7,110.33 152.4,110.33 153.67,111.6 153.67,119.86 154.31,120.49 170.18,120.49 170.81,119.86 PHONE.3
RXD1
  Bottom 0.406: IC4.8 25.81,108.42 31.12,108.42 33.02,110.33 45.72,110.33 46.99,111.6 46.99,119.86 47.63,120.49 63.5,120.49 64.14,119.86 PHONE1.3
SCK
  Bottom 0.305: IC1.15 136.43,101.98 139.7,105.25 143.51,105.25 J1.3
SCK1
  Bottom 0.305: IC4.15 29.75,101.98 33.02,105.25 36.83,105.25 J2.3
TXD
  Bottom 0.406: IC1.9 137.42,106.78 139.7,109.06 152.4,109.06 161.29,117.95 PHONE.4
TXD1
  Bottom 0.406: IC4.9 30.74,106.78 33.02,109.06 45.72,109.06 54.61,117.95 PHONE1.4
VIN  (1 unrouted)
  Bottom 0.406: 114.52,47.78 IC3.1 | IC3.1 114.7,47.82 | C9.1 113.08,47.82 IC3.1
  Bottom 0.61: JP10.1 111.76,45.56 114.3,48.1
VIN1  (1 unrouted)
  Bottom 0.406: 7.84,47.78 IC6.1 | IC6.1 8.02,47.82 | C18.1 6.4,47.82 IC6.1
  Bottom 0.61: JP20.1 5.08,45.56 7.62,48.1
VIN_S
  Bottom 0.406: JP9.2 JP10.2
VIN_S1
  Bottom 0.406: JP19.2 JP20.2

## Text on the board
Bottom: GSM Gate Opening Module / Kamil Górski / Grzegorz Hajdukiewicz / / 04.2013 | GSM Gate Opening Module / Kamil Górski / Grzegorz Hajdukiewicz / / 04.2013